# EAGLE board internal_env_board (EAGLE 8.0.1)
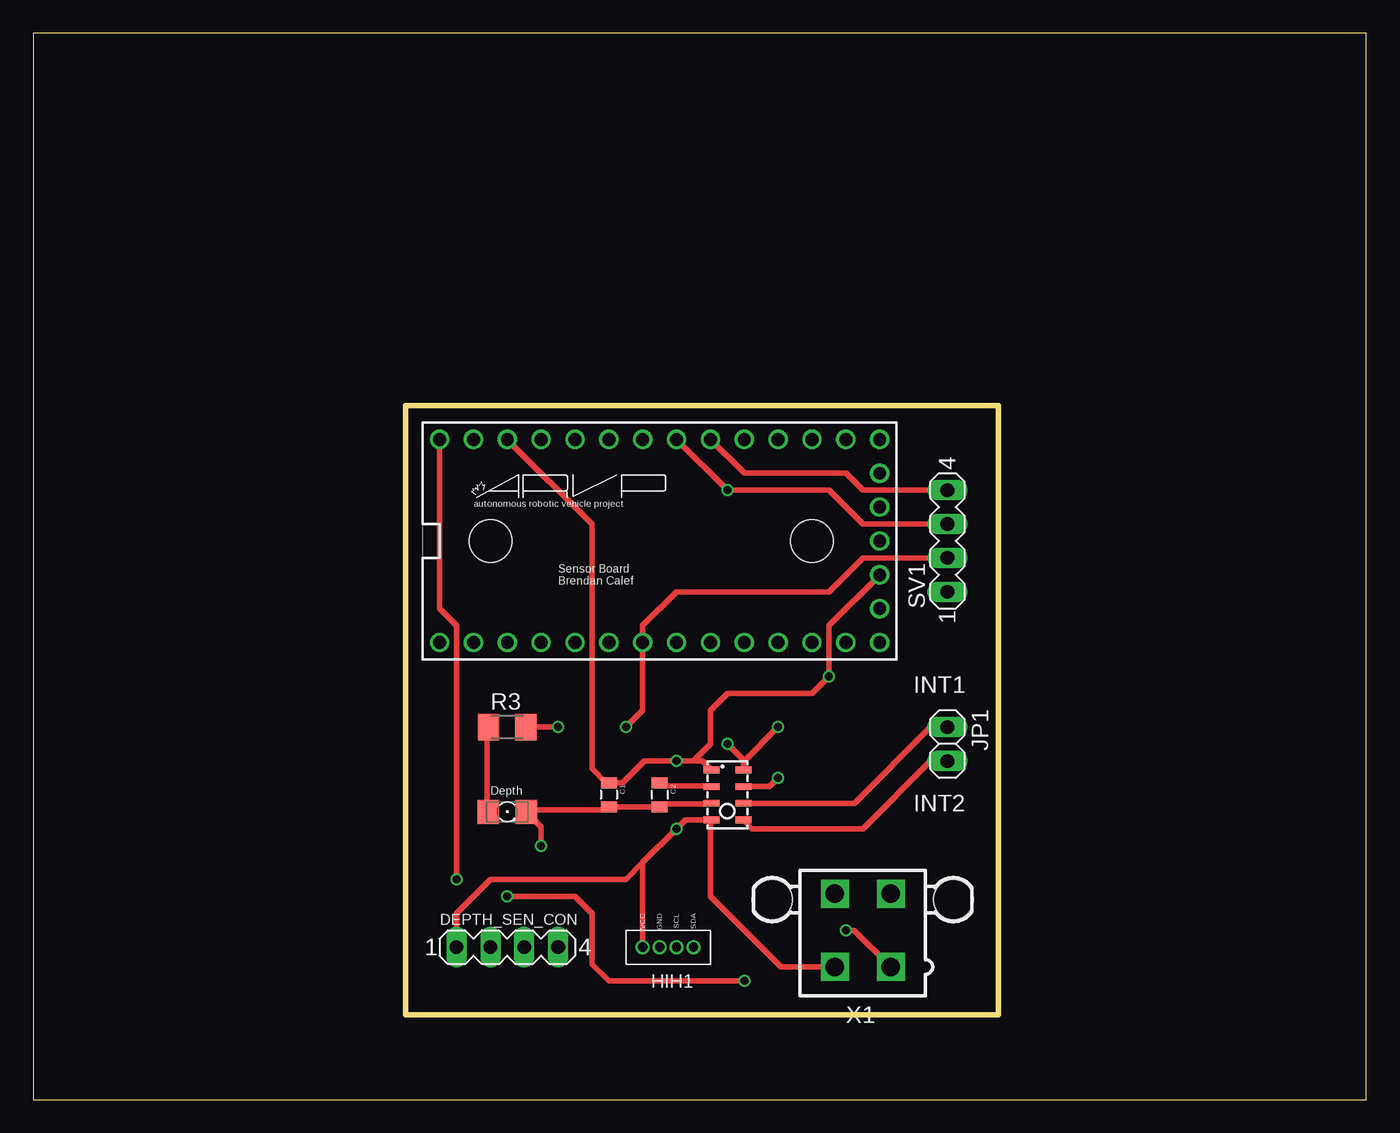
[diagram p0: board, top side]
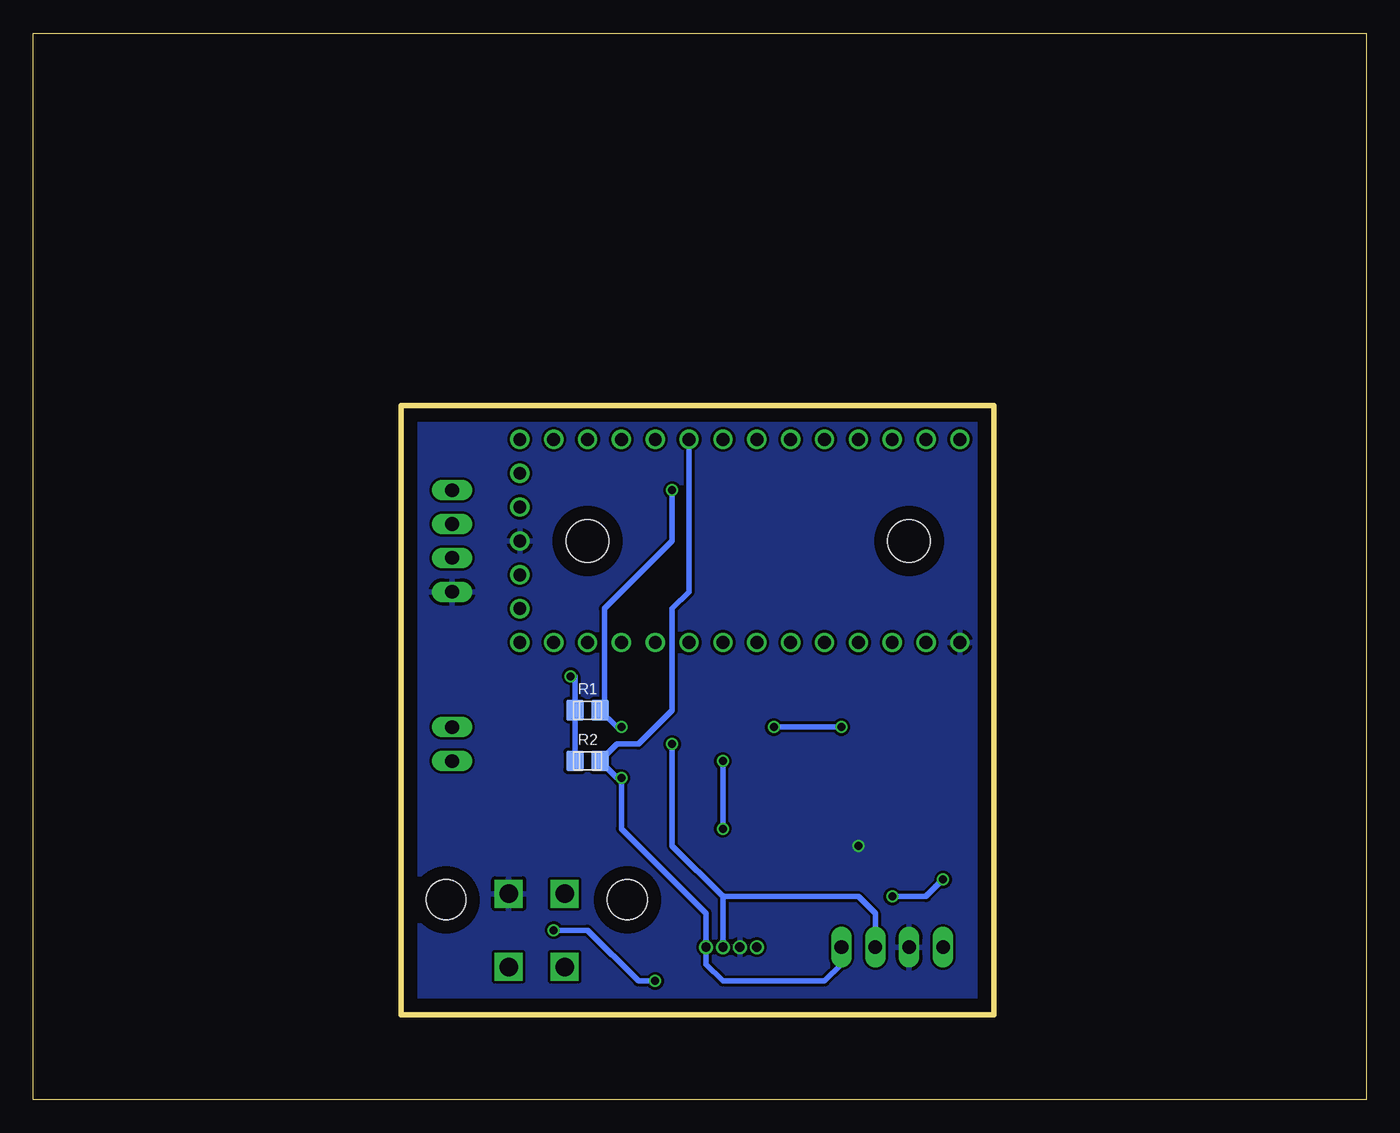
[diagram p1: board, bottom side, seen from below]

Size 100 x 80 mm. Coordinates in mm from the lower left corner, seen from the top.
Outline: 0,0 100,0 100,80 0,80 0,0
Outline: 27.94,52.07 72.39,52.07 72.39,6.35 27.94,6.35 27.94,52.07
Copper layers (1*16): Top 0.035mm / dielectric 1.5mm / Bottom 0.035mm
Design rules "default *": minimum track width 10mil, minimum drill 10mil, track to track 8mil, track to pad 8mil, pad to pad 8mil, via to via 8mil, smd to smd 8mil, copper to edge 40mil, drill to drill 8mil, minimum pad ring 4mil, minimum via ring 4mil, stop-mask expansion 4mil, vias tented up to drill 0mil, thermal gap 10mil
Net classes: 0 default: clearance 0.152 mm
Holes 3.2 mm at 34.29,41.91 58.42,41.91

## Footprints (pad centres in the part's own frame; a part is rotated, then mirrored left to right if it is on the bottom)
0805 = smd 0.8 x 1.2: 1 -0.9,0; 2 0.9,0
MA04-1 = drill 1.016 long: 1 -3.81,0; 2 -1.27,0; 3 1.27,0; 4 3.81,0
SIP4 = drill 0.7 pad 1.016: GND -1.27,0; SCL 0,0; SDA 1.27,0; VCC -2.54,0
1X02 = drill 1.016 long: 1 -1.27,0; 2 1.27,0
LED_1206 = smd 1.6 x 1.803: A -1.422,0; C 1.422,0
R0805 = smd 1.55 x 1.3: 1 0,0.95; 2 0,-0.95
M1206 = smd 1.6 x 2: 1 -1.4,0; 2 1.4,0
LGA8 = smd 1.2 x 0.5: 1 -1.2,1.875; 2 -1.2,0.625; 3 -1.2,-0.625; 4 -1.2,-1.875; 5 1.2,-1.875; 6 1.2,-0.625; 7 1.2,0.625; 8 1.2,1.875
TEENSY_3.1_BASIC = drill 0.965: 0 -7.62,13.97; 1 -7.62,11.43; 2 -7.62,8.89; 3 -7.62,6.35; 3.3V 7.62,11.43; 3.3V1 -2.54,-16.51; 4 -7.62,3.81; 5 -7.62,1.27; 6 -7.62,-1.27; 7 -7.62,-3.81; 8 -7.62,-6.35; 9 -7.62,-8.89; 10 -7.62,-11.43; 11 -7.62,-13.97; 12 -7.62,-16.51; 13 7.62,-16.51; 14/A0 7.62,-13.97; 15/A1 7.62,-11.43; 16/A2 7.62,-8.89; 17/A3 7.62,-6.35; 18/A4 7.62,-3.81; 19/A5 7.62,-1.27; 20/A6 7.62,1.27; 21/A7 7.62,3.81; 22/A8 7.62,6.35; 23/A9 7.62,8.89; A14 5.08,-16.51; AGND 7.62,13.97; GND -7.62,16.51; GND1 0,-16.51; PGM 2.54,-16.51; VBAT -5.08,-16.51; VIN 7.62,16.51
5566-4 = drill 1.4 square: 1 2.1,-2.75; 2 -2.1,-2.75; 3 2.1,2.75; 4 -2.1,2.75 | hole 3: 6.8,2.29; -6.8,2.29

## Placement (x,y rotation side)
C1  10uF  [0805]  43.18,22.86 270 top
C2  0.1uF  [0805]  46.99,22.86 270 top
DEPTH_SEN_CON  [MA04-1]  35.56,11.43 0 top
HIH1  HIH7120  [SIP4]  48.26,11.43 0 top
JP1  [1X02]  68.58,26.67 270 top
LED1  [LED_1206]  35.56,21.59 0 top
R1  4k7  [R0805]  58.42,29.21 270 bottom
R2  4k7  [R0805]  58.42,25.4 270 bottom
R3  [M1206]  35.56,27.94 0 top
SV1  [MA04-1]  68.58,41.91 90 top
U1  MPL3115A2LGA8  [LGA8]  52.07,22.86 0 top
U$1  [ARVP]  33.02,44.45 0 top
U$2  TEENSY_3.1_BASIC  [TEENSY_3.1_BASIC]  46.99,41.91 90 top
X1  5566-4  [5566-4]  62.23,12.7 0 top

## Library data of the parts
C1 C2 = SparkFun
DEPTH_SEN_CON SV1 = con-lstb; OC_FARNELL: unknown; OC_NEWARK: unknown
HIH1 = HIH7120
JP1 = pinhead
LED1 = eagle-ltspice; SPICEMODEL: NONE; SPICEPREFIX: D; SPICETYPE: diode
R1 R2 = we-rcl
R3 = resistor
U1 = SparkFun-Sensors
U$1 = ARVP
U$2 = Teensy_3_Series_Board_v1.0
X1 = con-molex; OC_FARNELL: unknown; OC_NEWARK: unknown

## Nets
3V3: C1.1 DEPTH_SEN_CON.1 HIH1.VCC R1.2 R2.2 U1.1 U1.4 U$2.3.3V U$2.3.3V1 X1.2
AGND: U$2.AGND
GND: C1.2 C2.2 DEPTH_SEN_CON.2 HIH1.GND LED1.C SV1.1 U1.3 U$2.GND U$2.GND1 X1.3
GPIO: R3.2 SV1.2 U$2.5
INT1: JP1.1 U1.6
INT2: JP1.2 U1.5
N$3: C2.1 U1.2
N$9: LED1.A R3.1
SCL: DEPTH_SEN_CON.3 HIH1.SCL R1.1 SV1.3 U1.8 U$2.19/A5
SDA: DEPTH_SEN_CON.4 HIH1.SDA R2.1 SV1.4 U1.7 U$2.18/A4
VBAT: U$2.VBAT
VCC: U$2.VIN X1.1

## Tracks (layer width: path | path; a pad name or v marks a point on that pad's centre or on a via)
3V3  (via drill 0.6)
  Top 0.254: 43.2,23.77 C1.1 42.98,23.77 | U1.1 50.75,24.69
  Top 0.406: 42.98,23.77 41.91,24.84 41.91,43.18 U$2.3.3V | 49.53,25.4 v48.26,25.4 45.85,25.4 44.21,23.76 C1.1 | 49.53,25.4 50.2,25.4 U1.1 50.8,24.8 | U$2.3.3V1 59.69,35.56 v59.69,31.75 58.42,30.48 52.07,30.48 50.8,29.21 50.8,26.67 49.53,25.4 | 45.72,17.78 v48.26,20.32 48.92,20.98 U1.4 50.8,20.91 50.8,15.24 56.09,9.95 X1.2 | 45.72,17.78 HIH1.VCC | DEPTH_SEN_CON.1 31.75,13.97 34.29,16.51 44.45,16.51 45.72,17.78
  Bottom 0.406: v48.26,20.32 v48.26,25.4 | v59.69,31.75 59.37,31.75 R1.2 R2.2
GND  (via drill 0.6)
  Top 0.254: 50.75,22.17 U1.3 | 47.09,22.17 C2.2 46.86,21.95 | 43.2,21.95 C1.2 42.98,21.95 42.75,21.72 | 37.03,21.72 LED1.C
  Top 0.406: 47.09,22.17 50.75,22.17 | 46.86,21.95 43.2,21.95 | 42.75,21.72 37.03,21.72 | LED1.C 38.1,20.47 v38.1,19.05
  pour Bottom: 27.94,52.07 72.39,52.07 72.39,6.35 27.94,6.35
GPIO  (via drill 0.6)
  Top 0.406: v44.45,27.94 45.72,29.21 U$2.5 45.72,35.56 48.26,38.1 59.69,38.1 62.23,40.64 SV1.2 | v39.37,27.94 R3.2
  Bottom 0.406: v39.37,27.94 v44.45,27.94
INT1
  Top 0.406: U1.6 61.6,22.23 67.31,27.94 JP1.1
INT2
  Top 0.406: U1.5 53.94,20.32 62.23,20.32 67.31,25.4 JP1.2
N$3
  Top 0.254: 50.75,23.55 U1.2 | 47.09,23.55 C2.1
  Top 0.406: 47.09,23.55 50.75,23.55
N$9
  Top 0.254: 34.06,21.72 LED1.A | 34.06,27.89 R3.1
  Top 0.406: 34.06,27.89 34.06,21.72
SCL  (via drill 0.6)
  Top 0.406: SV1.3 62.23,43.18 59.69,45.72 v52.07,45.72 U$2.19/A5 | U1.8 53.27,25.33 | 53.27,25.33 v55.88,27.94 | 53.27,25.33 53.27,25.47 v52.07,26.67
  Bottom 0.406: v55.88,27.94 56.2,27.94 R1.1 57.15,29.53 57.15,36.83 52.07,41.91 v52.07,45.72 | v52.07,26.67 52.07,19.05 48.26,15.24 | 48.26,15.24 HIH1.SCL | 48.26,15.24 38.1,15.24 36.83,13.97 DEPTH_SEN_CON.3
SDA  (via drill 0.6)
  Top 0.406: SV1.4 62.23,45.72 60.96,46.99 53.34,46.99 U$2.18/A4 | U1.7 55.23,23.48 v55.88,24.13
  Bottom 0.406: U$2.18/A4 50.8,38.1 52.07,36.83 52.07,29.21 54.61,26.67 56.2,26.67 R2.1 56.2,24.13 v55.88,24.13 55.88,20.32 49.53,13.97 HIH1.SDA 49.53,10.16 48.26,8.89 40.64,8.89 39.37,10.16 DEPTH_SEN_CON.4
VCC  (via drill 0.6)
  Top 0.406: U$2.VIN 30.48,36.83 31.75,35.56 v31.75,16.51 | X1.1 61.58,12.7 v60.96,12.7 | v35.56,15.24 40.64,15.24 41.91,13.97 41.91,10.16 43.18,8.89 v53.34,8.89
  Bottom 0.406: v60.96,12.7 58.42,12.7 54.61,8.89 v53.34,8.89 | v31.75,16.51 33.02,15.24 v35.56,15.24

## Text on the board
tPlace: Sensor Board / Brendan Calef | INT1 | Depth | INT2